# Altium PCB ScreenAdapterBoard2.PcbDoc
Units mil, origin at the board's own origin, x right, y up, seen from the top; angles counter-clockwise.
Board outline 1900 x 2500 mil, 2 copper layers (Top Layer, Bottom Layer); 9 components, 25 nets, 68 pads, 4 vias.
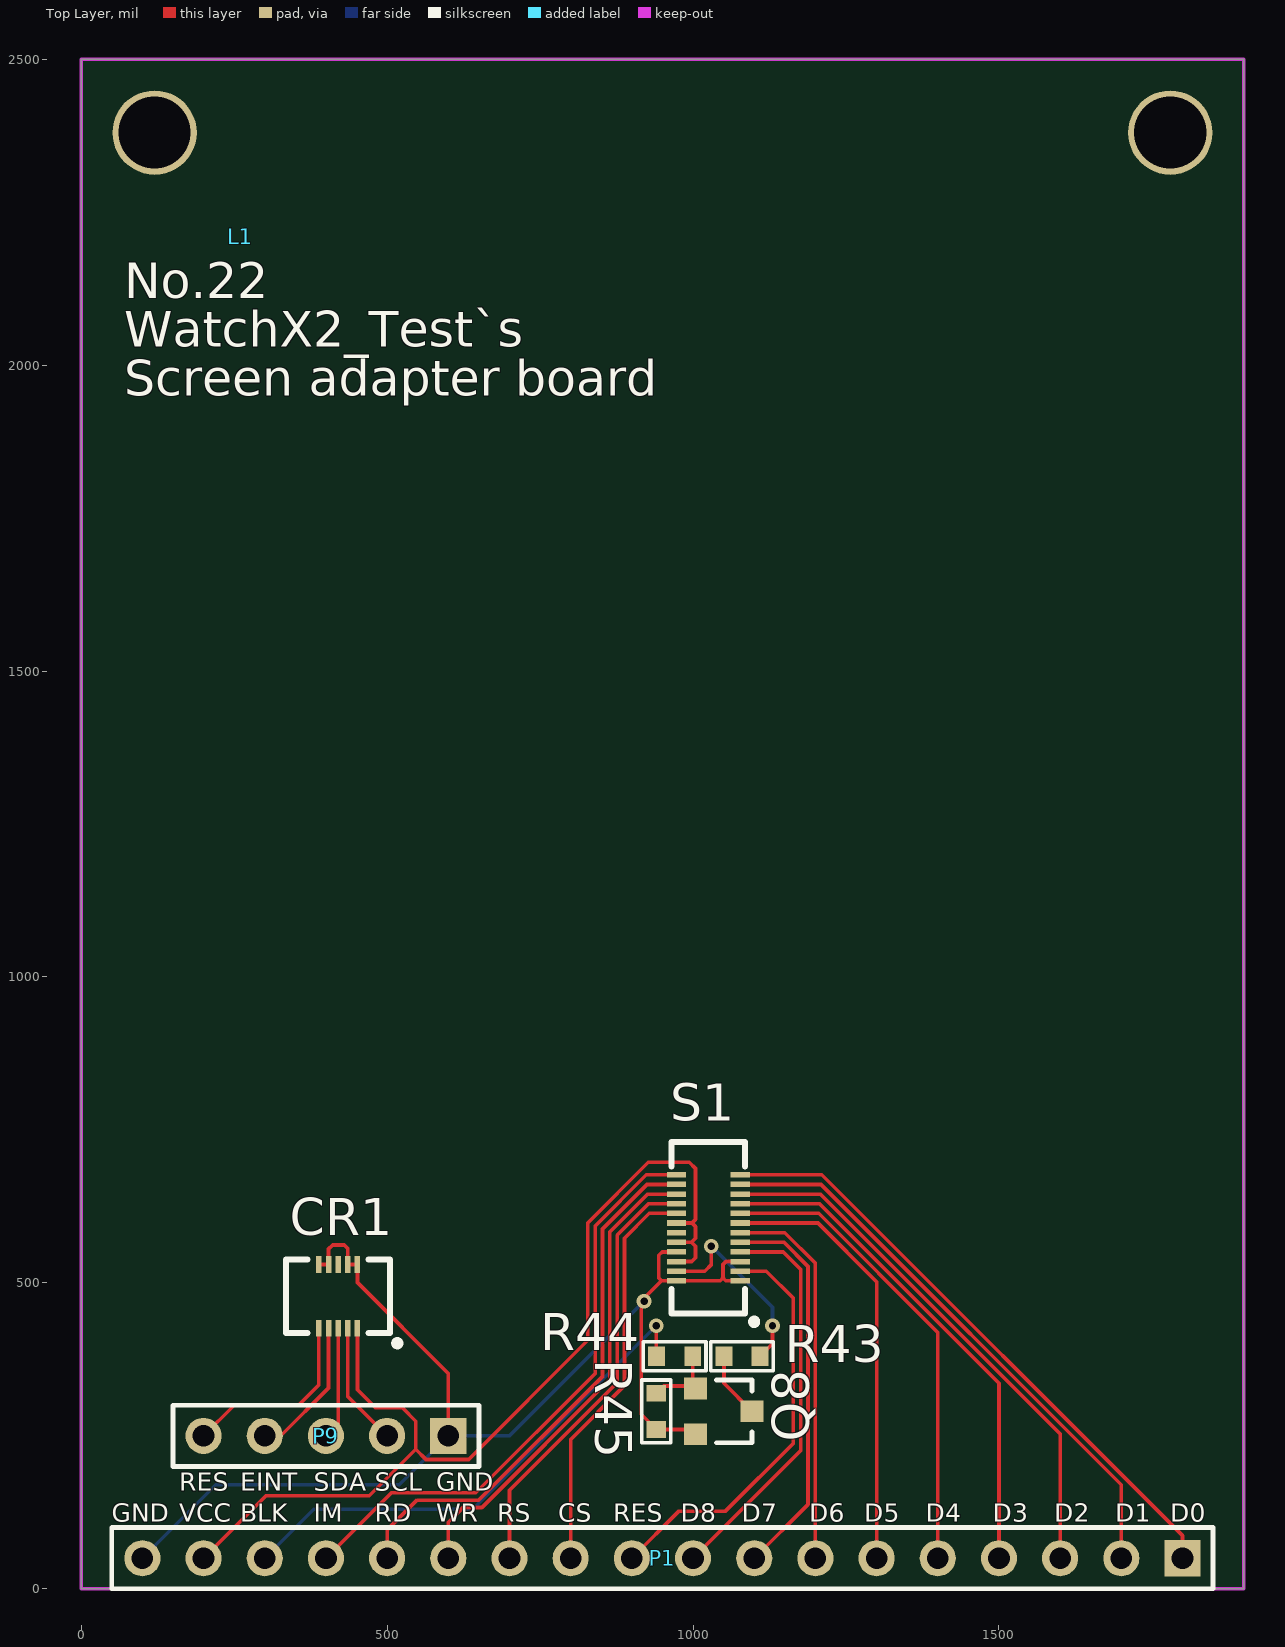
[diagram p0: Top Layer view]
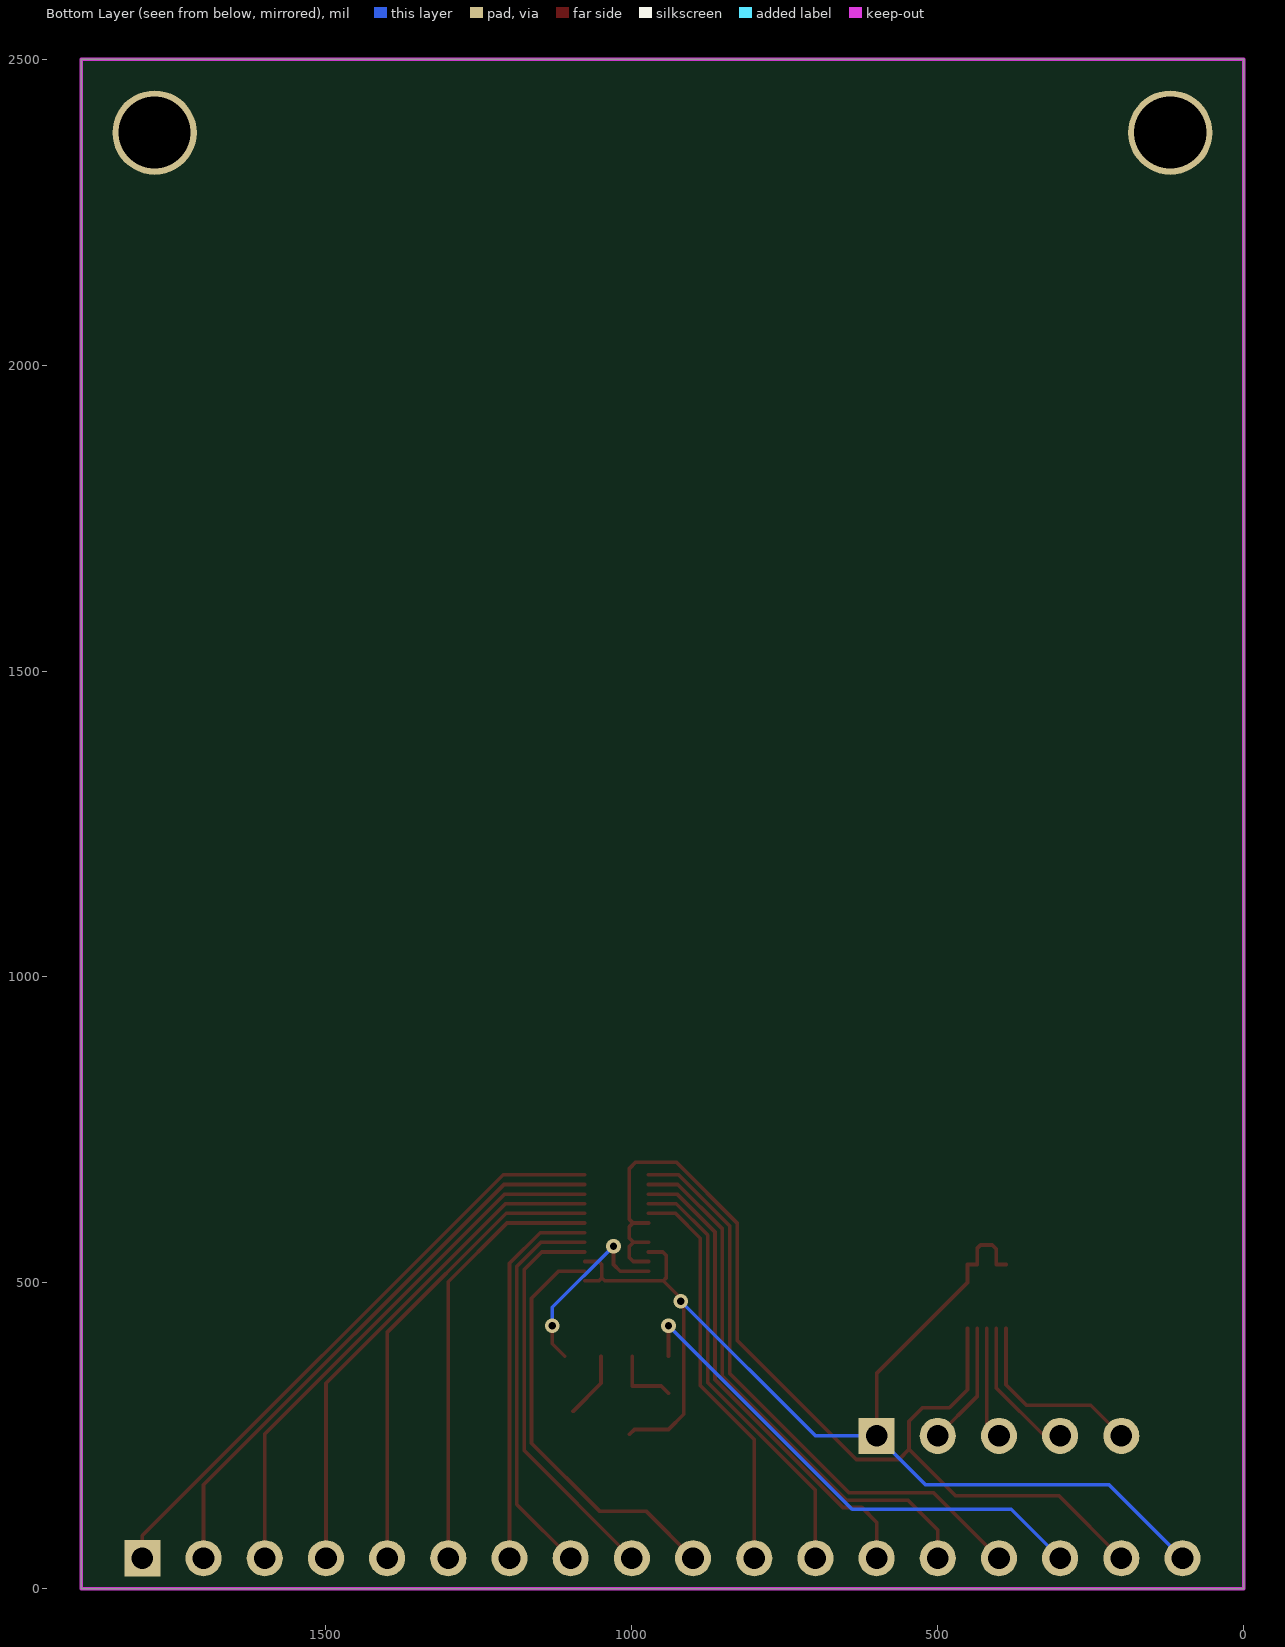
[diagram p1: Bottom Layer view, seen from below]
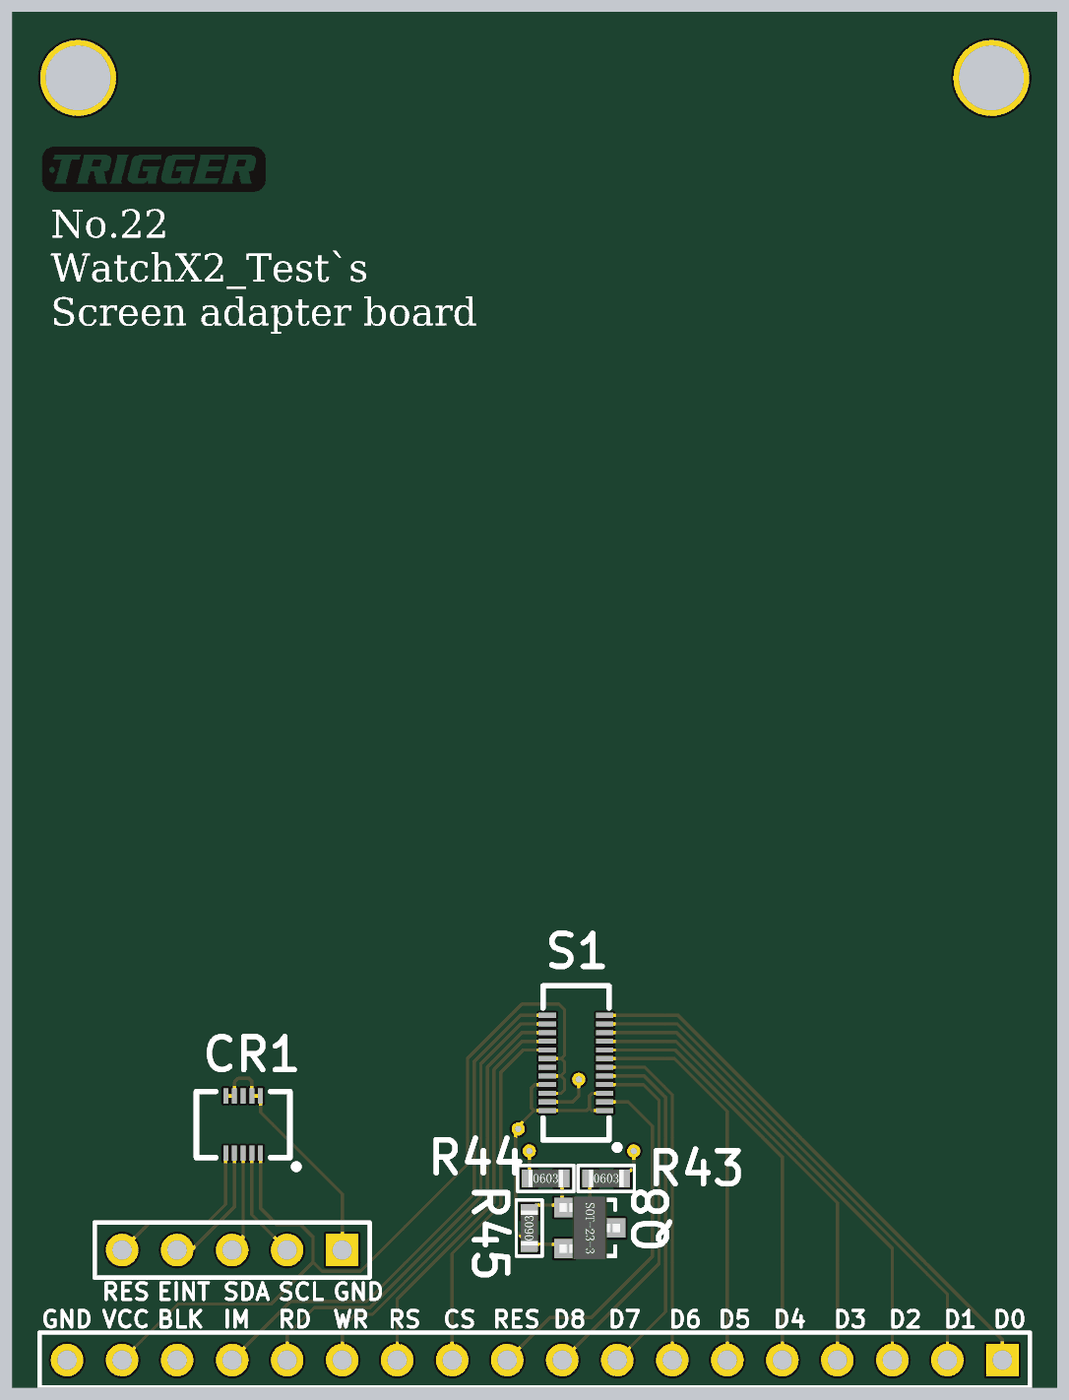
[diagram p2: 3D render of the assembled board from above, using the file's embedded part models]

## Layer stack, top to bottom
Top Solder: solder mask 0.4, Solder Resist, Dk 3.5
Top Layer: signal copper 1.4
Dielectric 1: dielectric 12.6, FR-4, Dk 4.8
Bottom Layer: signal copper 1.4
Bottom Solder: solder mask 0.4, Solder Resist, Dk 3.5

## Board outline
0,0 1900,0 1900,2500 0,2500

## Design rules (kind name [scope] priority, off if disabled: settings)
Clearance [All] p1: gap=6
ComponentClearance [All] p1 off: gap=10 collisioncheckmode=3 verticalgap=10 showdistances=FALSE
HoleSize [All] p1 off: absolutevalues=TRUE maxlimit=100 minlimit=1 maxpercent=80.000 minpercent=20.000
HoleToHoleClearance [All] p1 off: gap=10 allowstackedmicrovias=TRUE
LayerPairs [All] p1 off: enforce=TRUE
MinimumSolderMaskSliver [All] p1 off: minsoldermaskwidth=10
NetAntennae [All] p1 off: netantennaetolerance=0
PlaneConnect [All] p1: planeconnectstyle=Direct reliefexpansion=20 reliefentries=4 reliefconductorwidth=10 reliefairgap=10
PolygonConnect [All] p1: connectstyle=Direct reliefconductorwidth=10 reliefentries=4 polygonreliefangle="90 Angle" airgapwidth=10
RoutingVias [All] p1: holewidth=12 width=24 viastyle="Through Hole" minholewidth=12 minwidth=24 maxholewidth=12 maxwidth=24
SilkToSilkClearance [All] p1 off: silktosilkclearance=10
SilkToSolderMaskClearance [IsPad] p1 off: minsilkscreentomaskgap=10 clearancetoexposedcopper=TRUE
SolderMaskExpansion [All] p1: expansion=4
Width [All] p1: maxlimit=200 minlimit=6 preferedwidth=10
21 further rules are at their usual default settings.

## Components (designator, comment, footprint, x,y, rotation, side; value= is the part's Value field where it differs from the comment)
CR1 "CR10P" "CONN RCPT 10POS 0.4MM" 430,488 r0 top
L1 "LOGO" "LOGO L BS" 260,2210 r0 top
P1 "Header 18" HDR1X18 1800,50 r180 top
P9 "Header 5" HDR1X5 600,250 r180 top
Q8 "S8050" 三极管_SOT-23 1050,290 r270 top
R43 "10R" 电阻_R0603 1080,380 r0 top
R44 "1K" 电阻_R0603 970,380 r0 top
R45 "10K" 电阻_R0603 940,290 r90 top
S1 "SCREEN" CONN-SMD_DF37NC-24DS-0.4V(51) 1025,590 r90 top

## Footprints (in the part's own frame and the unit in brackets; to place one, negate y for a bottom-side part, rotate by r counter-clockwise, add the part's x,y. Pads: shape width x height; smd on the part's side, far side on the other; paste and mask are expansions set on the pad)
"CONN RCPT 10POS 0.4MM" [mm] "板对板连接器"
  rect 0.23x0.7 smd: 1(0.546,-1.579) 2(0.146,-1.579) 3(-0.254,-1.579) 4(-0.654,-1.579) 5(-1.054,-1.579) 6(-1.054,1.071) 7(-0.654,1.071) 8(-0.254,1.071) 9(0.146,1.071) 10(0.546,1.071)
  silkscreen extent -2.41,-2.33 2.33,1.27
CONN-SMD_DF37NC-24DS-0.4V(51) [mm] "板对板连接器"
  rect 0.23x0.8 smd: 1(-2.2,-1.325) 2(-1.8,-1.325) 3(-1.4,-1.325) 4(-1,-1.325) 5(-0.6,-1.325) 6(-0.2,-1.325) 7(0.2,-1.325) 8(0.6,-1.325) 9(1,-1.325) 10(1.4,-1.325) 11(1.8,-1.325) 12(2.2,-1.325) 13(2.2,1.325) 14(1.8,1.325) 15(1.4,1.325) 16(1,1.325) 17(0.6,1.325) 18(0.2,1.325) 19(-0.2,1.325) 20(-0.6,1.325) 21(-1,1.325) 22(-1.4,1.325) 23(-1.8,1.325) 24(-2.2,1.325)
  silkscreen extent -4.03,-2.03 3.56,1.52
HDR1X5 [mm] "Connector; Header; 5 Position"
  rect 1.5x1.5 hole 0.9: 1(0,0)
  round 1.5 hole 0.9: 2(2.54,0) 3(5.08,0) 4(7.62,0) 5(10.16,0)
  silkscreen extent -1.27,-1.27 11.43,1.27
HDR1X18 [mm] "Connector; Header; 18 Position"
  rect 1.5x1.5 hole 0.9: 1(0,0)
  round 1.5 hole 0.9: 2(2.54,0) 3(5.08,0) 4(7.62,0) 5(10.16,0) 6(12.7,0) 7(15.24,0) 8(17.78,0) 9(20.32,0) 10(22.86,0) 11(25.4,0) 12(27.94,0) 13(30.48,0) 14(33.02,0) 15(35.56,0) 16(38.1,0) 17(40.64,0) 18(43.18,0)
  silkscreen extent -1.27,-1.27 44.45,1.27
"LOGO L BS" [mil]
三极管_SOT-23 [mm]
  rect 0.9x0.95 smd: 1(-0.95,-1.175) 2(0,1.175) 3(0.95,-1.175)
  silkscreen extent -1.3,-0.3 1.3,1.18, body extent -1.45,-1.4 1.45,1.4, height 1.2
电阻_R0603 [mm]
  rect 0.7x0.8 smd: 1(-0.75,0) 2(0.75,0)
  silkscreen extent -1.3,-0.6 1.3,0.6, body extent -0.8,-0.4 0.8,0.4, height 0.45

## Part data
CR1: library part "CONN RCPT 10P", "板对板连接器"
L1: library part LOGO_TRIGGER
P1: "Header, 18-Pin"
P9: "Header, 5-Pin"
Q8: library part Triode-NPN
R43 R44 R45: library part Res
S1: library part "SCREEN 1.54  24P"

## Free pads (board coordinates)
  round 137.8 hole 118.11: 2(120,2380) 3(1780,2380)

## Via types
v1: diameter 24, hole 12, Top Layer to Bottom Layer, 4 vias

## Nets (pads, with @x,y where several pads share a name; then routed paths per layer and width w, separated by ;. In a path a pad name is that pad's centre, name@x,y a point inside that pad or via, vN(x,y) a via of type N, cw(c..) or ccw(c..) an arc to the next point about the centre after c; other vN are vias at no path point)
GND: CR1.6 CR1.7 CR1.9 CR1.10 P1.18 P9.1 Q8.3 R45.1 S1.1 S1.3 S1.21 S1.24 | length 2048.2
  Top Layer w6: CR1.6 CR1.7 404.25,555.25 411,562 430,562 435.74,556.26 CR1.9 CR1.10 451.49,500.51 600,352 P9.1 ; S1.21 949.62,550.62 944,545 944,508 948.61,503.39 ; Q8.3 995.87,260.47 R45.1 915.25,285.22 915.25,465.25 v1(920,470) 920,474.77 948.61,503.39 ; S1.1 1053.61,503.39 1049,508 ; S1.3 1053.89,534.89 1049,530 1049,508 ; 948.61,503.39 S1.24 1044.39,503.39 1049,508
  Bottom Layer w6: P1.18 220,170 520,170 P9.1 700,250 v1(920,470)
NetQ8_1: Q8.1 R44.2 R45.2 | length 112.9
  Top Layer w6: R45.2 952.09,331.61 999.53,331.61 R44.2
NetQ8_2: Q8.2 R43.1 | length 109
  Top Layer w6: R43.1 1050.47,335.79 Q8.2
SCREEN_VCC: CR1.1 P1.17 S1.18 S1.20 S1.22 | length 1705.2
  Top Layer w6: P1.17 302,152 471,152 547,228 ; CR1.1 451.49,325.51 481,296 525,296 547,274 547,228 ; S1.22 997.89,534.89 1004,541 1004,559.75 997.38,566.38 ; S1.20 997.38,566.38 ; S1.18 998.12,597.88 ; 547,228 563.53,211.47 633.26,211.47 828,406.22 828,598 927,697 994,697 1004,687 1004,603.75 998.12,597.88 ; 997.38,566.38 1004,573 1004,592 998.12,597.88
TFT_BLK: P1.16 R44.1 | length 847.6
  Top Layer w6: v1(940,430) 940,380.47 R44.1
  Bottom Layer w6: P1.16 380,130 640,130 v1(940,430)
TFT_CS: P1.11 S1.17 | length 661.2
  Top Layer w6: P1.11 800,244.12 888,332.12 888,573.15 928.48,613.62 S1.17
TFT_DB0: P1.1 S1.12 | length 1004.1
  Top Layer w6: S1.12 1210.39,676.61 1800,87 P1.1
TFT_DB1: P1.2 S1.11 | length 946.1
  Top Layer w6: S1.11 1209.02,660.86 1700,169.88 P1.2
TFT_DB2: P1.3 S1.10 | length 888.2
  Top Layer w6: S1.10 1207.8,645.11 1600,252.91 P1.3
TFT_DB3: P1.4 S1.9 | length 830.3
  Top Layer w6: S1.9 1206.58,629.36 1500,335.94 P1.4
TFT_DB4: P1.5 S1.8 | length 772.4
  Top Layer w6: S1.8 1205.35,613.62 1400,418.97 P1.5
TFT_DB5: P1.6 S1.7 | length 714.5
  Top Layer w6: S1.7 1204.12,597.88 1300,502 P1.6
TFT_DB6: P1.7 S1.6 | length 625.6
  Top Layer w6: S1.6 1149.82,582.12 1200,531.94 P1.7
TFT_DB7: P1.8 S1.5 | length 640.6
  Top Layer w6: S1.5 1148.6,566.38 1188,526.97 1188,138 P1.8
TFT_DB8: P1.9 S1.4 | length 655.6
  Top Layer w6: P1.9 1176,226 1176,522 1147.38,550.62 S1.4
TFT_IM: P1.15 S1.13 | length 973.6
  Top Layer w6: P1.15 507,157 645,157 840,352 840,593.03 923.59,676.61 S1.13
TFT_LEDK: R43.2 S1.23 | length 321.6
  Top Layer w6: S1.23 1019.14,519.14 1030,530 v1(1030,560) ; R43.2 1130,400.47 v1(1130,430)
  Bottom Layer w6: v1(1030,560) 1130,460 v1(1130,430)
TFT_RD: P1.14 S1.14 | length 894
  Top Layer w6: P1.14 500,96 549,145 649.97,145 852,347.03 852,588.06 924.81,660.86 S1.14
TFT_RES: P1.10 S1.2 | length 684
  Top Layer w6: P1.10 977,127 1053,127 1164,238 1164,475 1119.86,519.14 S1.2
TFT_RS: P1.12 S1.16 | length 719.1
  Top Layer w6: P1.12 700,161.09 876,337.09 876,578.12 927.25,629.36 S1.16
TFT_WR: P1.13 S1.15 | length 795.1
  Top Layer w6: P1.13 600,109 624,133 654.94,133 864,342.06 864,583.09 926.03,645.11 S1.15
TP_EINT: CR1.4 P9.4 | length 234.3
  Top Layer w6: P9.4 326,250 404.25,328.25 CR1.4
TP_RES: CR1.5 P9.5 | length 315.4
  Top Layer w6: P9.5 250,300 355,300 388.5,333.5 CR1.5
TP_SCL: CR1.2 P9.2 | length 202.5
  Top Layer w6: CR1.2 435.74,314.26 P9.2
TP_SDA: CR1.3 P9.3 | length 184.1
  Top Layer w6: P9.3 420,270 CR1.3
pads on no net: CR1.8 S1.19

## Keep-outs
Keep-Out Layer:
  the board outline again, w6

## Silkscreen, mask and mechanical layers (free items; w line width, h text height)
Top Overlay:
  text "No.22" at 70,2090 h100
  text "WatchX2_Test`s" at 70,2010 h100
  text "Screen adapter board" at 70,1930 h100
  text "RES" at 160,160 h30
  text "EINT" at 260,160 h30
  text "SDA" at 380,160 h30
  text "SCL" at 480,160 h30
  text "GND" at 580,160 h30
  text "GND" at 50,110 h30
  text "VCC" at 160,110 h30
  text "BLK" at 260,110 h30
  text "IM" at 380,110 h30
  text "RD" at 480,110 h30
  text "WR" at 580,110 h30
  text "RS" at 680,110 h30
  text "CS" at 780,110 h30
  text "RES" at 870,110 h30
  text "D8" at 980,110 h30
  text "D7" at 1080,110 h30
  text "D6" at 1190,110 h30
  text "D5" at 1280,110 h30
  text "D4" at 1380,110 h30
  text "D3" at 1490,110 h30
  text "D2" at 1590,110 h30
  text "D1" at 1690,110 h30
  text "D0" at 1780,110 h30
Mechanical 1:
  the board outline again, w6